# Altium PCB PCB3.PcbDoc
Units mil, origin at the board's own origin, x right, y up, seen from the top; angles counter-clockwise.
Board outline 1500 x 875 mil, 2 copper layers (Top Layer, Bottom Layer); 10 components, 15 nets, 51 pads, 9 vias.
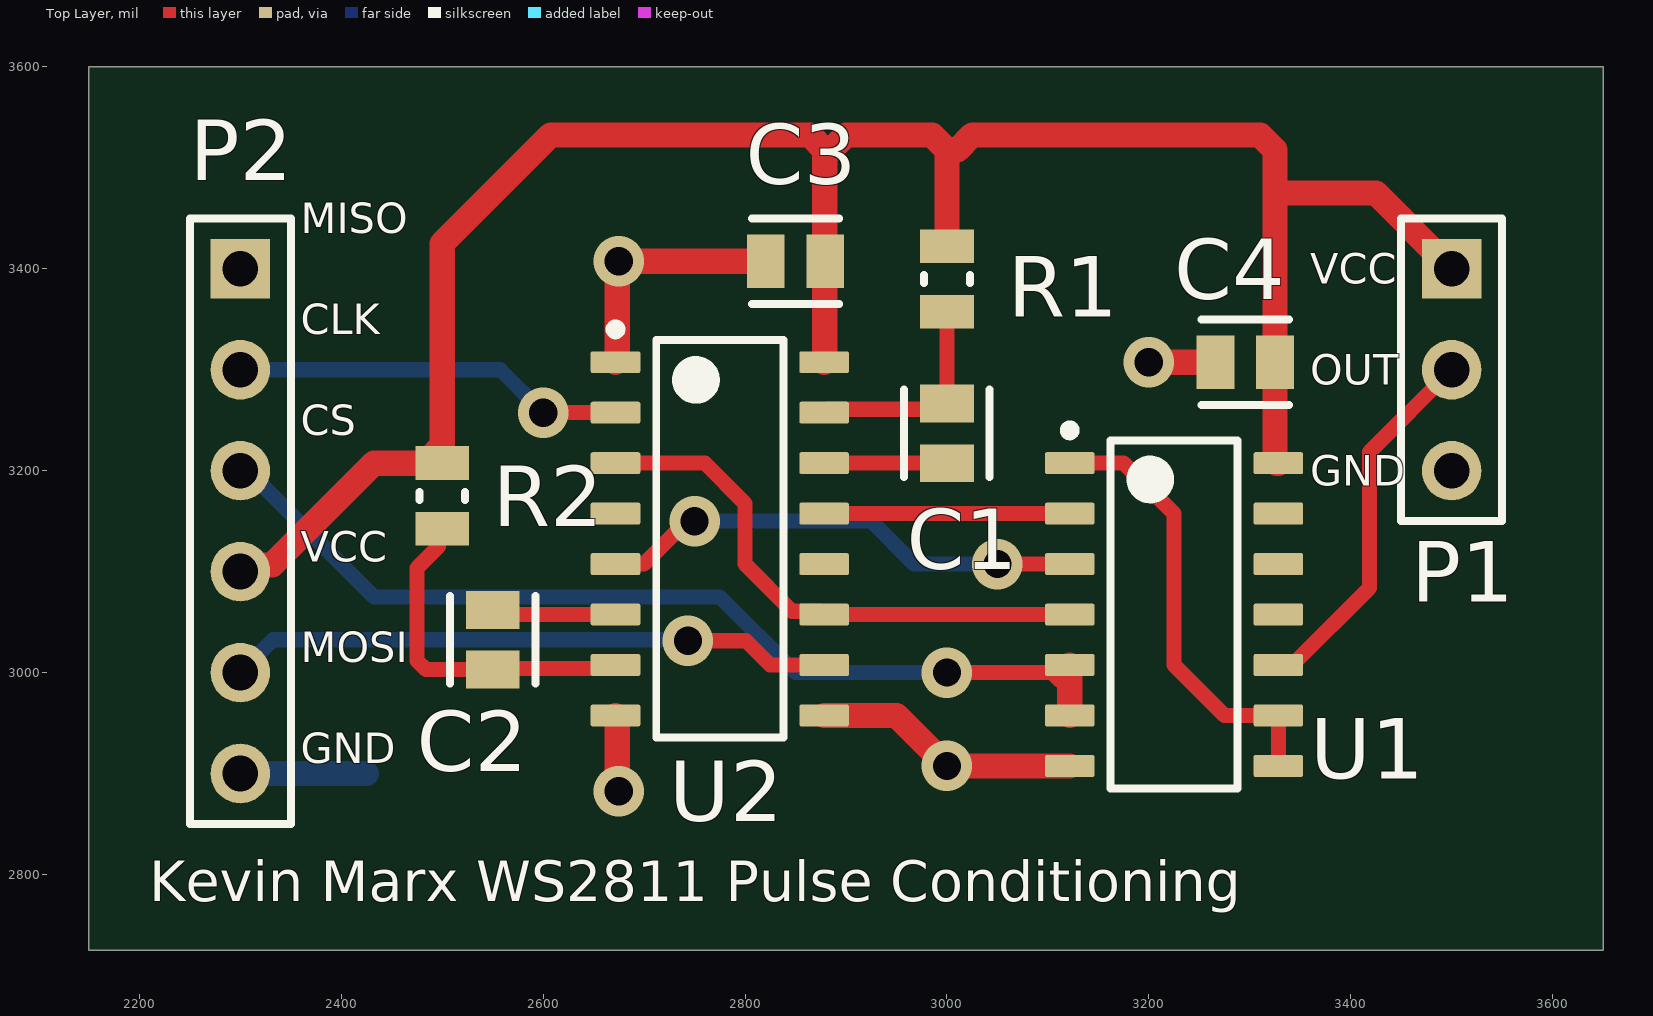
[diagram p0: Top Layer view]
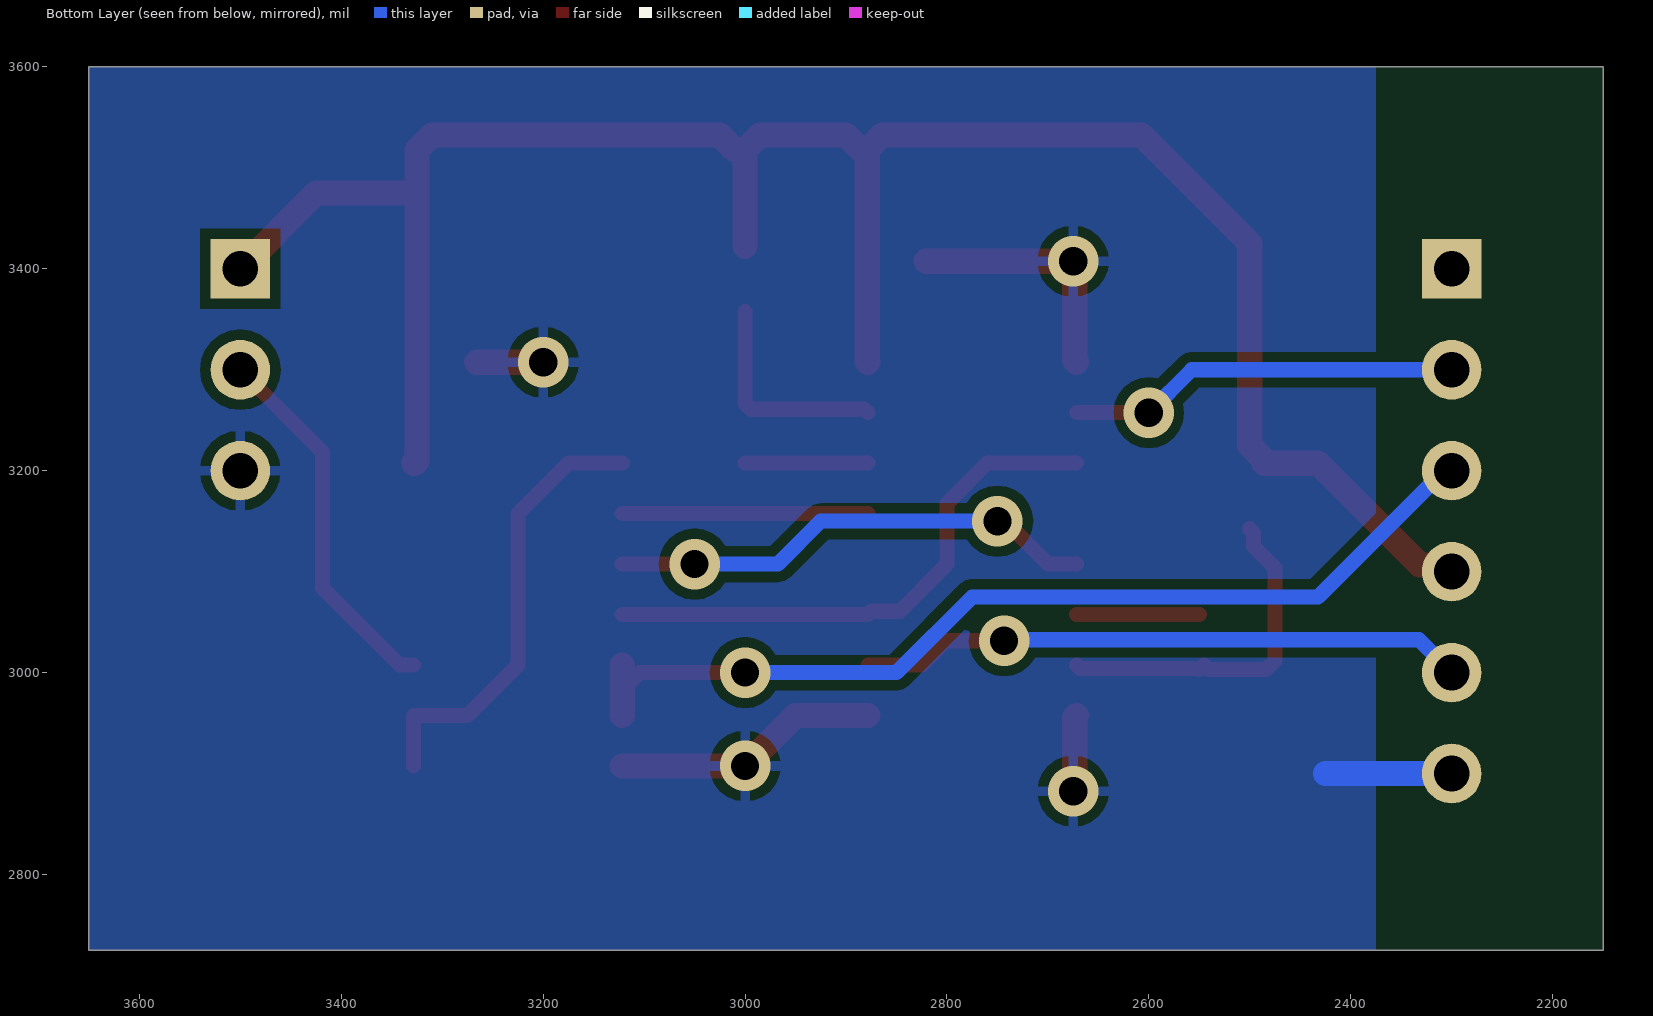
[diagram p1: Bottom Layer view, seen from below]
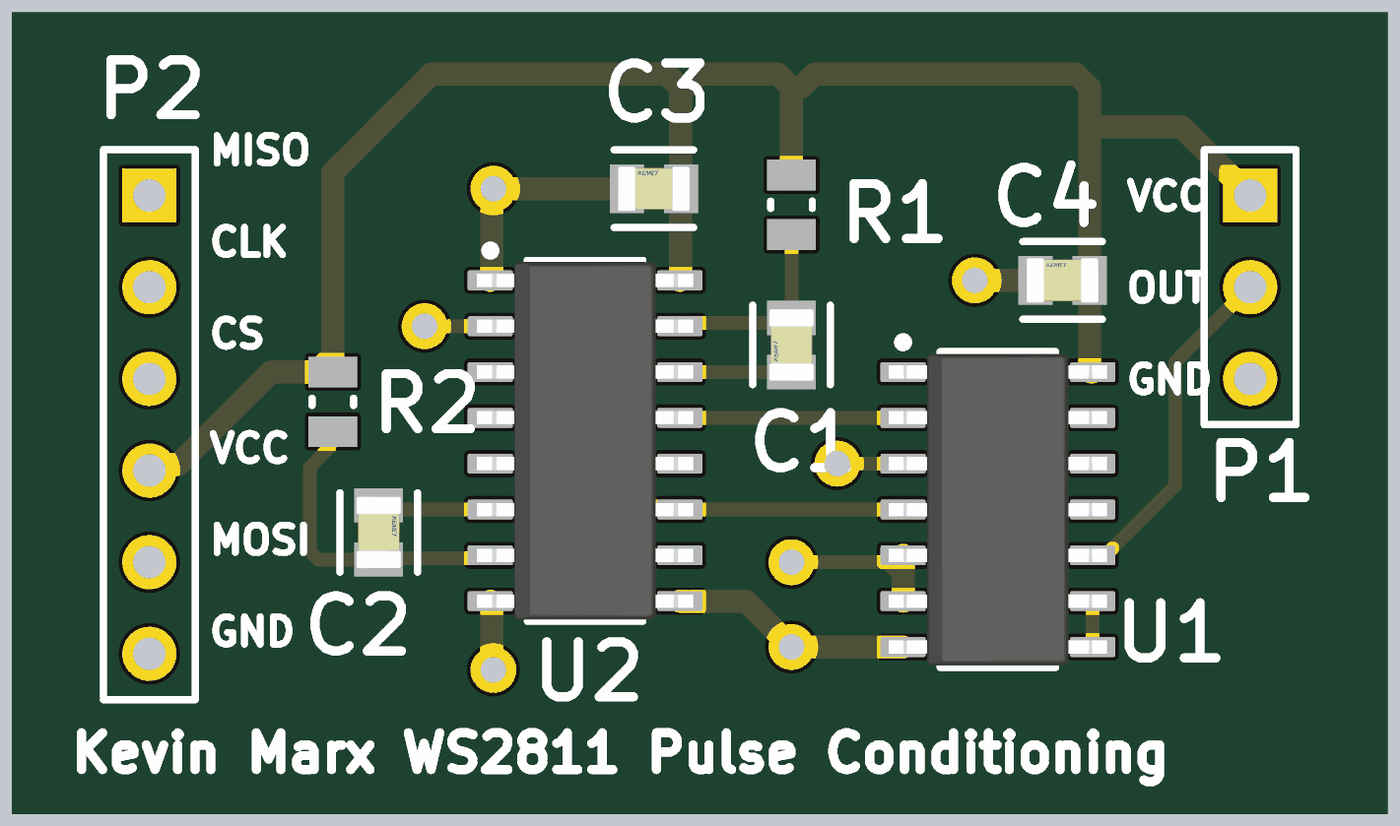
[diagram p2: 3D render of the assembled board from above, using the file's embedded part models]

## Layer stack, top to bottom
Top Solder: solder mask 0.4, Solder Resist, Dk 3.5
Top Layer: signal copper 1.4
Dielectric 1: dielectric 12.6, FR-4, Dk 4.8
Bottom Layer: signal copper 1.4
Bottom Solder: solder mask 0.4, Solder Resist, Dk 3.5

## Board outline
2150,2725 3650,2725 3650,3600 2150,3600

## Design rules (kind name [scope] priority, off if disabled: settings)
Clearance [All] p1: gap=10 ignorepadtopadclearanceinfootprint=FALSE except(0: Arc-Hole Track-Hole SMDPad-Hole THPad-Hole Via-Hole Fill-Hole Poly-Hole Region-Hole Text-Hole)
PolygonConnect [All] p1: connectstyle=Relief reliefconductorwidth=10 reliefentries=4 polygonreliefangle="90 Angle" airgapwidth=10
RoomDefinition schem [InComponentClass('schem')] p1: confinementstyle=ConfineIn formatcopy=TRUE lockcomponents=FALSE outline 2150,2725 3650,2725 3650,3600 2150,3600
RoutingVias [All] p1: holewidth=28 width=50 viastyle="Through Hole" minholewidth=28 minwidth=50 maxholewidth=28 maxwidth=50
SolderMaskExpansion [All] p1: expansion=4 istentingtop=FALSE
Width [All] p1: maxlimit=50 minlimit=5 preferedwidth=15
30 further rules are at their usual default settings.

## Components (designator, comment, footprint, x,y, rotation, side; value= is the part's Value field where it differs from the comment)
C1 "0.1 uF 0805" FP-C0805C-DN-MFG 3000,3237.01 r90 top value="0.10 μF"
C2 "0.1 uF 0805" FP-C0805C-DN-MFG 2550,3032.48 r270 top value="0.10 μF"
C3 "0.1 uF 0805" FP-C0805C-DN-MFG 2850,3407.48 r0 top value="0.10 μF"
C4 "0.1 uF 0805" FP-C0805C-DN-MFG 3295.47,3307.48 r0 top value="0.10 μF"
P1 "Header 3" HDR1X3 3500,3400 r270 top
P2 "Header 6" HDR1X6 2300,3400 r270 top
R1 "4.1k 0805" RESC2013X50X30LL20T20 3000,3389.96 r270 top
R2 "9.1k 0805" RESC2013X50X30LL20T20 2500,3175 r270 top
U1 "SN74HC02DR" D0014A_L 3225,3057.48 r0 top
U2 "SN74LS123DR" D0016A_L 2775,3132.48 r0 top

## Footprints (in the part's own frame and the unit in brackets; to place one, negate y for a bottom-side part, rotate by r counter-clockwise, add the part's x,y. Pads: shape width x height; smd on the part's side, far side on the other; paste and mask are expansions set on the pad)
D0014A_L [mm] "SOIC, 14-Leads, Body 8.75x4mm, Pitch 1.27mm, IPC High Density"
  rrect18% 1.25x0.55 smd: 1(-2.625,3.81) 2(-2.625,2.54) 3(-2.625,1.27) 4(-2.625,0) 5(-2.625,-1.27) 6(-2.625,-2.54) 7(-2.625,-3.81) 8(2.625,-3.81) 9(2.625,-2.54) 10(2.625,-1.27) 11(2.625,0) 12(2.625,1.27) 13(2.625,2.54) 14(2.625,3.81)
  silkscreen extent -2.75,-4.38 1.6,4.76, body extent -3.02,-4.32 3.02,4.32, height 1.59
D0016A_L [mm] "SOIC, 16-Leads, Body 10x4mm, Pitch 1.27mm, IPC High Density"
  rrect18% 1.25x0.55 smd: 1(-2.625,4.445) 2(-2.625,3.175) 3(-2.625,1.905) 4(-2.625,0.635) 5(-2.625,-0.635) 6(-2.625,-1.905) 7(-2.625,-3.175) 8(-2.625,-4.445) 9(2.625,-4.445) 10(2.625,-3.175) 11(2.625,-1.905) 12(2.625,-0.635) 13(2.625,0.635) 14(2.625,1.905) 15(2.625,3.175) 16(2.625,4.445)
  silkscreen extent -2.75,-5 1.6,5.39, body extent -3,-4.95 3,4.95, height 1.59
FP-C0805C-DN-MFG [mm]
  rect 0.95x1.35 smd paste+0 mask+0: 1(-0.75,0) 2(0.75,0)
  silkscreen extent -1.1,-1.07 1.1,1.07, body extent -1.4,-0.85 1.4,0.85, height 0.25
HDR1X3 [mm] "Connector; Header; 3 Position"
  rect 1.5x1.5 hole 0.9: 1(0,0)
  round 1.5 hole 0.9: 2(2.54,0) 3(5.08,0)
  silkscreen extent -1.27,-1.27 6.35,1.27
HDR1X6 [mm] "Connector; Header; 6 Position"
  rect 1.5x1.5 hole 0.9: 1(0,0)
  round 1.5 hole 0.9: 2(2.54,0) 3(5.08,0) 4(7.62,0) 5(10.16,0) 6(12.7,0)
  silkscreen extent -1.27,-1.27 13.97,1.27
RESC2013X50X30LL20T20 [mm] "Chip Resistor, 2-Leads, Body 2.00x1.25mm, IPC High Density"
  rect 0.85x1.35 smd: 1(-0.825,0) 2(0.825,0)
  silkscreen extent -0.1,-0.58 0.1,0.58, body extent -1.1,-0.72 1.1,0.72, height 0.5

## Part data
C1 C2 C3 C4: library part CMP-03020-032818-1, "CAP CER 0.1UF 100V X7R 0805", Capacitance="0.10 μF", Manufacturer=KEMET, Manufacturer Part Number=C0805C104K1RACAUTO, Package=C0805C-DN, Temperature="-55°C to +125°C", Temperature Characteristic=X7R, Temperature Coefficient=30ppm/°C, Temperature Range High=+125°C, Temperature Range Low=-55°C, Tolerance=0.1, Voltage Rating="100 V", Automotive=No, Category=Cap, ComponentLink2Description=Datasheet, ComponentLink2URL=https://content.kemet.com/datasheets/KEM_C1003_C0G_SMD.pdf, Device Class L1="Passive Components", Device Class L2=Capacitors, Device Class L3="Ceramic Capacitors", Digikey Description="CAP CER 0.1UF 100V X7R 0805", Height=0.88mm, Ipc Land Pattern Name=CAPC200125X78, Lead Free=Yes, Material=Ceramic, Octopart=https://octopart.com/c0805c104k1racauto-kemet-12625098, RoHS=TRUE
P1: "Header, 3-Pin", LatestRevisionDate=17-Jul-2002, LatestRevisionNote="Re-released for DXP Platform.", Publisher="Altium Limited"
P2: "Header, 6-Pin", LatestRevisionDate=17-Jul-2002, LatestRevisionNote="Re-released for DXP Platform.", Publisher="Altium Limited"
R1 R2: library part CMP-2001-04896-1, Manufacturer="Vishay Dale", Part Number=CRCW08050000Z0EA
U1: library part CMP-0806-00065-3, "Quadruple 2-Input Positive-NOR Gates, D0014A, LARGE T&R", F @ Nom Voltage(Max)(Mhz)=70, Generic Part Number=SN74HC02, ICC @ Nom Voltage(Max)(mA)=0.02, Manufacturer="Texas Instruments", Operating Temperature Range(C)="-40 to 85", Rating=Catalog, tpd @ Nom Voltage(Max)(ns)=23, Voltage(Nom)(V)=5, Bits(#)=4, Code_JEDEC=MS-012, DatasheetVersion=SCLS076E, Input Type=CMOS, Output Drive (IOL/IOH)(Max)(mA)=4/-4, Output Type=CMOS, PackageReference=D0014A, PackageVersion=http://www.ti.com/lit/ml/mpds177g/mpds177g.pdf, VCC(Max)(V)=6, VCC(Min)(V)=2
U2: library part CMP-1629-00043-2, "Dual retriggerable monostable multivibrators, D0016A, LARGE T&R", F @ Nom Voltage(Max)(Mhz)=35, Generic Part Number=SN74LS123, ICC @ Nom Voltage(Max)(mA)=20, Manufacturer="Texas Instruments", Operating Temperature Range(C)="0 to 70", Rating=Catalog, tpd @ Nom Voltage(Max)(ns)=56, Voltage(Nom)(V)=5, Bits(#)=2, Code_JEDEC="MS-012 variation AC", DatasheetVersion=SDLS043, Input Type=TTL, Output Drive (IOL/IOH)(Max)(mA)=8/-0.4, Output Type=TTL, PackageReference=D0016A, Schmitt Trigger=No, Technology Family=LS, VCC(Max)(V)=5.25, VCC(Min)(V)=4.75

## Via types
v1: diameter 50, hole 28, Top Layer to Bottom Layer, 9 vias

## Nets (pads, with @x,y where several pads share a name; then routed paths per layer and width w, separated by ;. In a path a pad name is that pad's centre, name@x,y a point inside that pad or via, vN(x,y) a via of type N, cw(c..) or ccw(c..) an arc to the next point about the centre after c; other vN are vias at no path point)
CLK: P2.2 U2.2 | length 389.3
  Top Layer w15: v1(2600,3257.48) U2.2
  Bottom Layer w15: P2.2 2557.48,3300 v1(2600,3257.48)
CLR: U1.4 U2.3 U2.11 | length 547.3
  Top Layer w15: U2.3 2760.1,3207.48 2800,3167.58 2800,3107.48 2846.67,3060.81 2875.02,3060.81 U2.11 U1.4
CS: P2.3 U1.5 U1.6 | length 959.6
  Top Layer w15: v1(3000,3000) 3104.13,3000 3121.65,2982.48
  Top Layer w25: U1.6 3121.65,2982.48 U1.5
  Bottom Layer w15: P2.3@2303.74,3203.74 2432.48,3075 2775,3075 2850,3000 v1(3000,3000)
GND: C3.1 C4.1 P1.3 P2.6 U1.7 U2.1 U2.8 U2.9 | length 785
  Top Layer w25: U2.8 2673.33,2955.81 2673.33,2884.15 v1(2675,2882.48) ; U2.1 2673.33,3309.15 2673.33,3405.81 v1(2675,3407.48) C3.1 ; U2.9 2950,2957.48 v1(3000,2907.48) U1.7 ; v1(3200,3307.48) C4.1
  Bottom Layer w25: P2.6 2425,2900 ; v1@2993.24,2907.48 v1(3000,2907.48)
MISO: P2.1
MOSI: P2.5 U2.10 | length 602.2
  Top Layer w15: v1(2743.45,3031.55) 2800.93,3031.55 2825,3007.48 U2.10
  Bottom Layer w15: P2.5 2332.48,3032.48 2742.52,3032.48 v1(2743.45,3031.55)
NEOPIXEL: P1.2 U1.10 | length 371.7
  Top Layer w15: U1.10 3342.13,3007.48 3418.51,3083.87 3418.51,3218.51 P1.2
NetC1_1: C1.1 U2.14 | length 121.7
  Top Layer w15: U2.14 C1.1
NetC1_2: C1.2 R1.2 U2.15 | length 216.3
  Top Layer w15: U2.15 2881.67,3260.81 2994.27,3260.81 C1.2 R1.2
NetC2_1: C2.1 U2.6 | length 121.7
  Top Layer w15: C2.1@2550,3057.48 U2.6
NetC2_2: C2.2 R2.2 U2.7 | length 340.8
  Top Layer w15: R2.2 2496.26,3138.78 2496.26,3125 2475,3103.74 2475,3011.74 2483.79,3002.95 2540.94,3002.95 2545.47,3007.48 C2.2 ; C2.2@2555.73,3004.15 2668.33,3004.15 U2.7
NetU1_1: U1.1 U1.8 U1.9 | length 448.1
  Top Layer w15: U1.1 3175,3207.48 3225,3157.48 3225,3007.48 3275,2957.48 U1.9 U1.8
One: U1.3 U2.5 | length 485.2
  Top Layer w15: U2.5 2700,3107.48 2742.52,3150 v1(2750,3150) ; v1(3050,3107.48) U1.3
  Bottom Layer w15: v1(2750,3150) 2925,3150 2967.52,3107.48 v1(3050,3107.48)
VCC: C3.2 C4.2 P1.1 P2.4 R1.1 R2.1 U1.14 U2.16 | length 2185.9
  Top Layer w25: P2.4 2306.52,3106.52 2331.52,3106.52 2432.48,3207.48 2485.93,3207.48 2486.32,3207.87 2486.32,3211.32 2500,3225 2500,3425 2607.48,3532.48 2864.29,3532.48 2878.94,3517.84 ; U2.16 2878.94,3308.07 2878.94,3407.48 2878.94,3517.84 ; R1.1 3000,3517.84 ; U1.14 3326.67,3207.48 3325,3209.15 C4.2 3325,3475 ; P1.1 3425,3475 3325,3475 ; 2878.94,3517.84 2885.36,3517.84 2900,3532.48 2985.36,3532.48 3000,3517.84 ; 3000,3517.84 3010.36,3517.84 3025,3532.48 3310.36,3532.48 3325,3517.84 3325,3475
  Bottom Layer w25: P2.4@2300,3092.52 P2.4
Zero: U1.2 U2.13 | length 243.3
  Top Layer w15: U2.13 U1.2
pads on no net: U1.11 U1.12 U1.13 U2.4 U2.12

## Polygon pours and split planes (outlines as drawn)
GND on Bottom Layer "GND_L02_P001" (solid, remove dead copper, pour order 1): 2375,3600 3650,3600 3650,2725 2375,2725

## Silkscreen, mask and mechanical layers (free items; w line width, h text height)
Top Overlay:
  text "MISO" at 2360,3435 h30
  text "VCC" at 3360,3385 h30
  text "CLK" at 2360,3335 h30
  text "OUT" at 3360,3285 h30
  text "CS" at 2360,3235 h30
  text "GND" at 3360,3185 h30
  text "VCC" at 2360,3110 h30
  text "MOSI" at 2360,3010 h30
  text "GND" at 2360,2910 h30
  text "Kevin Marx WS2811 Pulse Conditioning" at 2210,2773.33 h40
Mechanical 1:
  the board outline again, w10